# Altium PCB PCB1.PcbDoc (part 4 of 4)
Units mm, origin at the board's own origin, x right, y up, seen from the top; angles counter-clockwise.
Board outline 99.06 x 89.76 mm, 2 copper layers (Top Layer, Bottom Layer); 159 components, 99 nets, 478 pads, 226 vias.
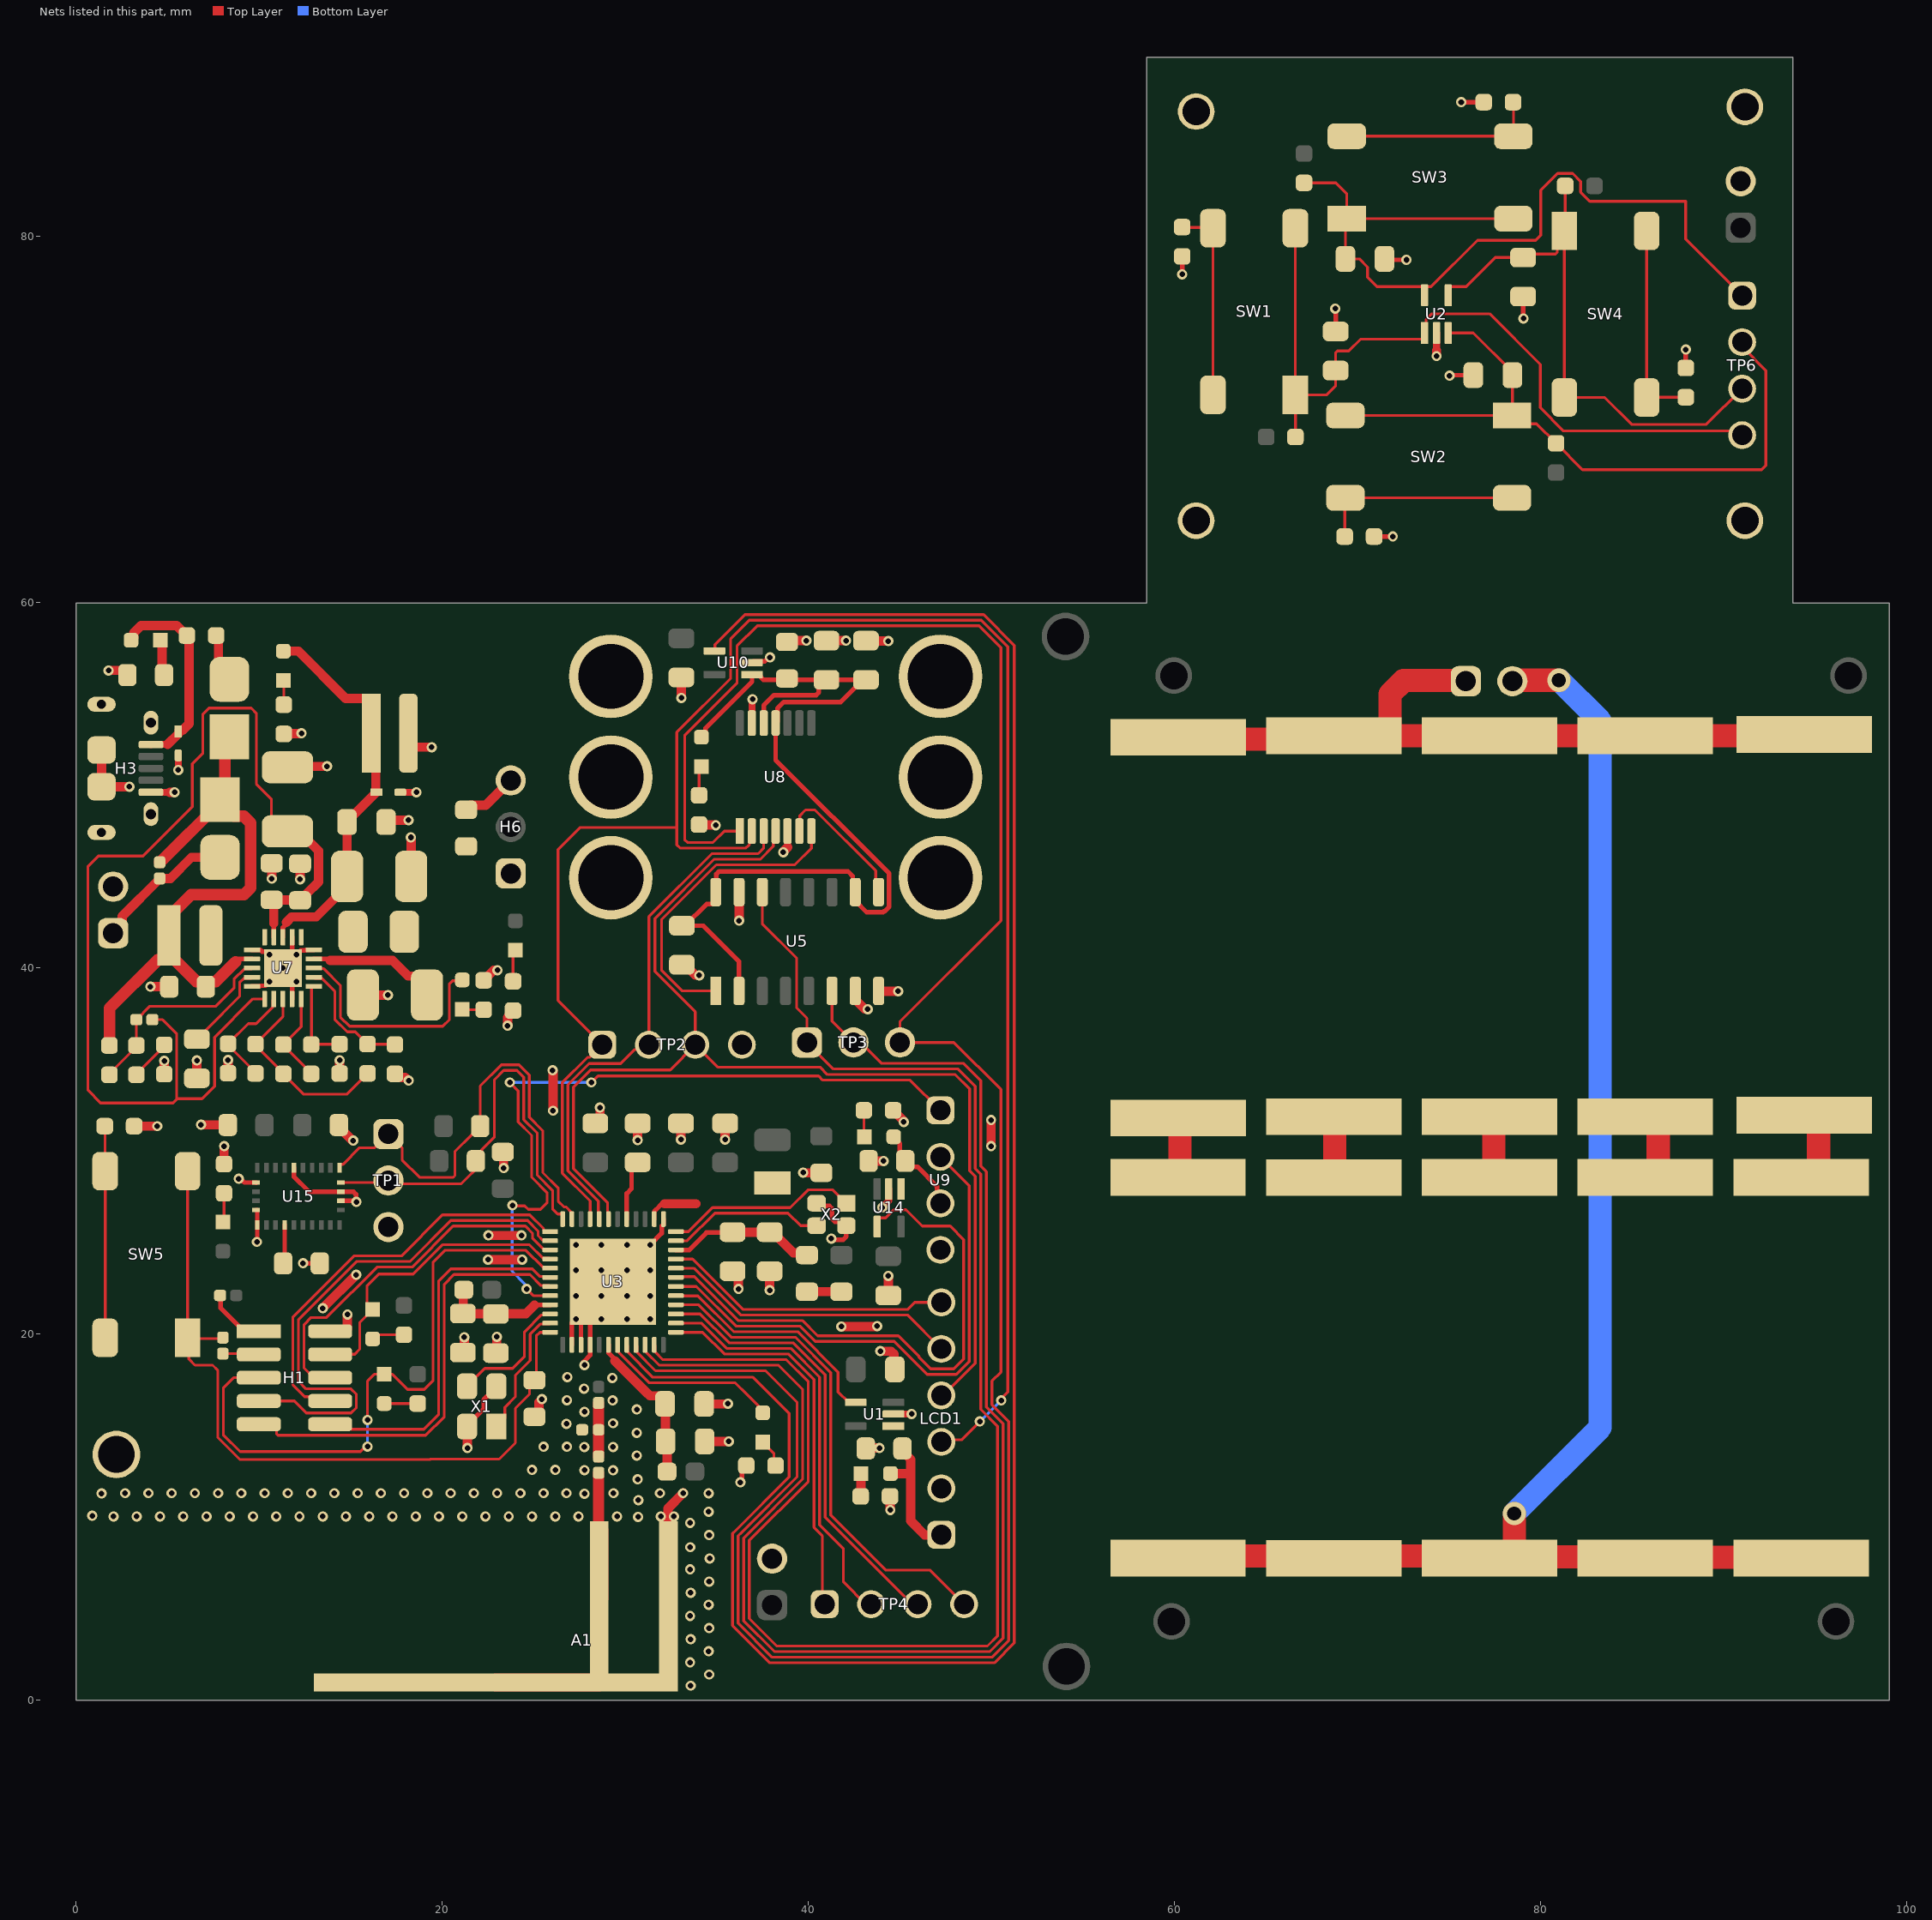
[diagram p2: the nets of this part, all layers, seen from the top]

## Via types
v1: diameter 0.559, hole 0.305, Top Layer to Bottom Layer, tented both sides, 222 vias
v2: diameter 0.61, hole 0.305, Top Layer to Bottom Layer, tented both sides, 2 vias
v3: diameter 1.27, hole 0.762, Top Layer to Bottom Layer, tented both sides, 2 vias

## Nets (pads, with @x,y where several pads share a name; then routed paths per layer and width w, separated by ;. In a path a pad name is that pad's centre, name@x,y a point inside that pad or via, vN(x,y) a via of type N, cw(c..) or ccw(c..) an arc to the next point about the centre after c; other vN are vias at no path point) (continued)
+3V7_VBAT: C24.1 C25.1 H2.V+ LED5.A U4.1 U7.18 | length 21.2
  Top Layer w0.254: U7.18@11.303,41.695 11.306,41.698 11.306,42.225 11.489,42.408
  Top Layer w0.508: LED5.A@11.328,57.315 12.154,57.315 14.732,54.737 15.875,54.737 16.129,54.483 H2.V+@16.129,52.832 16.382,52.579 16.382,49.643 U4.1@16.419,49.606 ; 11.489,42.512 11.775,42.798 13.125,42.798 C24.1@14.811,44.484 ; C24.1@14.811,45.009 14.81,45.01 14.81,47.979 C25.1@14.808,47.981 14.808,48.14 15.087,48.419 15.223,48.419 16.348,49.543 U4.1@16.348,49.552
+5V_VBUS: H3.1 LED6.A R26.1 U6.1 | length 11.1
  Top Layer w0.381: H3.1@4.097,52.211 4.106,52.221 5.01,52.221 ; U6.1@5.588,52.798 U6.1@5.588,52.923
  Top Layer w0.508: LED6.A@3.01,58.058 3.156,58.058 3.156,58.312 3.562,58.718 5.506,58.718 R26.1@6.058,58.166 ; 5.01,52.221 U6.1@5.588,52.798 ; U6.1@5.642,52.994 5.833,52.994 6.185,53.346 R26.1@6.185,58.166
AVDD: C18.1 C19.1 R20.2 U3.34 | length 7.9
  Top Layer w0.152: C18.1@37.49,25.476 C18.1@37.657,25.476 ; C18.1@37.897,25.578 C18.1@38.063,25.578 ; R20.2@39.804,24.452 R20.2@39.929,24.327
  Top Layer w0.254: U3.34@32.772,24.61 33.5,24.61 34.442,25.552 35.382,25.552 C19.1@35.458,25.476
  Top Layer w0.508: C19.1@35.865,25.578 37.49,25.578 C18.1@37.897,25.578 ; C18.1@38.063,25.578 39.189,24.452 R20.2@39.804,24.452
BRD_Reset: C20.1 R12.1 SW5.1 SW5.2 U3.12 | length 42.6
  Top Layer w0.152: SW5.2@6.096,28.912 SW5.1@6.096,19.812 SW5.1@6.139,19.769 ; R12.1@8.026,19.769 SW5.1@6.139,19.769 ; C20.1@25.161,17.265 25.161,17.271 25.572,17.681 C20.1@25.578,17.681 ; U3.12@25.902,20.11 25.342,20.11 25.146,19.914 25.146,17.596 C20.1@25.044,17.494 24.771,17.22 24.771,16.719 24.003,15.951 24.003,14.072 23.114,13.183 19.351,13.183 19.326,13.158 8.966,13.158 7.747,14.377 7.747,18.034 7.468,18.313 6.502,18.313 6.172,18.644 6.172,19.736 SW5.1@6.139,19.769
DECOUPLE: C16.1 U3.41 | length 3.2
  Top Layer w0.254: U3.41@30.087,26.295 30.084,26.298 30.084,27.689 30.349,27.954 C16.1@30.349,29.388
FEED: A1.FEED L2.2 | length 17.1
  Top Layer w0.62: A1.FEED@28.55,9.296 L2.2@28.55,12.438
  Top Layer w0.991: A1.FEED@22.936,0.978 28.562,0.978 28.575,0.991 A1.FEED@28.575,5.588
  Top Layer w1.016: A1.FEED@28.575,5.588 A1.FEED@28.575,9.271
GND: A1.GND C1.2 C2.2 C3.2 C4.2 C5.2 C6.2 C7.2 C8.2 C9.2 C10.2 C11.2 C12.2 C13.2 C14.2 C15.2 C16.2 C17.2 C18.2 C19.2 C20.2 C21.2 C22.2 C23.2 C24.2 C25.2 C26.2 C27.2 C28.2 C29.2 C30.2 C31.2 C33.2 C34.2 C35.2 C36.2 C38.2 C39.2 C42.2 H1.2 H2.V- H3.5 H3.S1 H3.S2 H3.S3 H3.S4 H3.S5 H3.S6 H7.2 LCD1.2 MH1.1 MH2.1 MH3.1 MH4.1 MH7.1 MH8.1 MH9.1 MH10.1 MH11.1 MH16.1 MH17.1 R2.2 R4.1 R7.1 R8.1 R10.1 R17.2 R18.1 R19.2 R21.1 R23.2 R30.2 R31.2 R33.2 R34.1 R36.2 R37.1 R39.2 R40.1 TP1.3 TP2.4 TP5.2 TP7.2 U1.2 U2.2 U3.0 U3.14 U3.15 U3.16 U3.37 U4.2 U5.7 U5.8 U5.15 U6.2 U7.0 U7.1 U7.5 U7.9 U7.15 U7.17 U8.5 U8.13 U9.4 U10.2 U14.2 U15.2 U15.5 U15.6 U15.17 U15.18 U15.25 X1.2 X1.4 X2.2 X2.4 | length 131.6
  Top Layer w0.152: R33.2@8.089,29.303 R33.2@8.089,29.303 ; v1@8.09,30.275 v1(8.091,30.276) ; C23.2@10.668,45.704 C23.2@10.693,45.729 ; C21.2@11.557,50.975 C21.2@11.938,51.356 ; U7.0@11.803,39.056 12.015,39.268 v1(12.04,39.268) ; C36.2@13.315,23.88 C36.2@13.319,23.876 ; H2.V-@18.161,52.832 18.161,52.488 H2.V-@18.579,52.07 ; v1(18.288,47.142) v1@18.311,47.12 ; C30.2@33.096,40.183 C30.2@33.122,40.157 ; U8.13@36.918,53.387 U8.13@36.938,53.407 ; v1@36.938,54.667 v1(36.957,54.686) ; v1(39.726,28.829) v1@39.735,28.82 ; C42.2@43.155,57.887 C42.2@43.18,57.861 ; v1(68.783,76.022) v1@68.809,75.997 ; v1(75.032,72.365) v1@75.057,72.39 ; v1@79.045,75.514 v1(79.07,75.489)
  Top Layer w0.254: v1(8.89,28.499) 9,28.499 9.208,28.291 9.837,28.291 U15.2@9.841,28.288 ; U7.5@9.613,39.005 9.616,39.008 10.045,39.008 10.076,39.039 10.337,39.039 v1(10.566,39.268) ; U7.1@9.613,41.005 9.616,41.002 10.065,41.002 10.153,40.914 10.155,40.914 10.166,40.903 10.405,40.903 v1(10.566,40.742) ; U15.5@9.841,26.788 9.901,26.788 9.903,26.786 9.903,25.067 v1(9.881,25.044) ; C23.2@10.668,45.704 C23.2@10.693,45.679 ; R30.2@11.354,52.794 R30.2@11.373,52.813 ; U7.9@11.803,38.315 U7.0@11.803,39.056 ; U7.17@11.803,41.695 11.803,40.903 11.971,40.735 U7.0@12.033,40.735 ; U15.25@11.903,29.1 11.905,29.098 11.905,28.608 12.725,27.788 15.151,27.788 15.3,27.639 15.3,27.245 v1(15.316,27.229) 15.257,27.288 U15.17@14.466,27.288 ; U7.0@12.064,40.742 12.064,40.766 12.269,40.971 12.53,40.971 12.561,41.002 12.99,41.002 U7.15@12.993,41.005 ; v1@12.3,52.813 v1(12.319,52.832) ; v1(12.407,23.88) C36.2@13.315,23.88 ; R40.1@14.359,34.246 R40.1@14.402,34.246 ; C25.2@16.822,47.981 C25.2@16.924,48.082 ; X1.4@21.361,14.961 21.361,15.031 21.865,15.534 21.876,15.534 22.272,15.93 22.272,16.439 22.421,16.588 22.458,16.588 23.101,17.23 X1.2@23.101,17.413 ; v1@21.374,13.805 v1(21.387,13.792) ; X1.4@21.374,14.858 X1.4@21.43,14.914 ; R18.1@22.263,39.345 R18.1@22.276,39.332 ; C20.2@25.254,15.704 C20.2@25.451,15.9 ; U3.14@27.087,19.425 27.087,20.61 v1(27.305,20.828) ; U3.15@27.587,19.425 27.587,21.11 U3.0@28.087,21.61 ; v1@27.714,18.481 28.084,18.851 28.084,19.422 U3.16@28.087,19.425 U3.0@28.087,21.61 ; C17.2@28.372,31.521 C17.2@28.626,31.775 ; U3.0@29.337,22.86 U3.0@28.087,21.61 ; v1(31.369,24.892) 31.996,25.519 31.996,25.904 32.087,25.995 U3.37@32.087,26.295 ; R31.2@34.036,47.841 R31.2@34.055,47.822 ; v1@34.931,47.822 v1(34.95,47.803) ; v1@35.602,16.197 v1(35.611,16.205) ; v1(36.297,11.913) 36.297,11.989 36.373,12.065 36.373,12.586 R17.2@36.614,12.827 ; U10.2@36.932,56.693 37.005,56.766 37.624,56.766 37.829,56.971 v1(37.912,56.971) ; X2.2@40.455,27.157 40.607,27.005 41.152,27.005 41.3,26.856 41.3,26.299 41.449,26.15 41.861,26.15 X2.4@42.08,25.932 ; v1(41.254,25.227) 41.309,25.171 41.91,25.171 42.08,25.341 X2.4@42.08,25.962 ; U5.8@43.84,38.753 U5.8@43.858,38.735 ; C38.2@44.374,22.123 C38.2@44.4,22.15 ; R36.2@44.64,32.18 R36.2@44.64,32.233 ; C2.2@44.677,18.137 C2.2@44.729,18.085 ; v1(60.427,77.902) R4.1@60.427,78.88 ; C3.2@68.809,74.778 v1@68.809,75.997 ; R7.1@70.904,63.576 v1(71.933,63.576) ; C5.2@71.476,78.74 71.526,78.689 v1(72.669,78.689) ; v1@75.057,72.39 C4.2@76.327,72.39 ; v1(75.667,87.3) R8.1@76.899,87.3 ; v1@79.045,75.514 C6.2@79.045,76.683 ; R10.1@87.935,72.784 v1(87.935,73.787)
  Top Layer w0.381: H3.5@4.102,49.606 v1@5.131,49.606 ; v1(5.588,50.825) U6.2@5.588,51.623 ; U4.2@17.719,49.606 v1(18.593,49.606) ; U8.13@36.938,53.407 v1@36.938,54.667 ; 38.868,46.607 U8.5@38.868,47.487 ; v1(44.044,26.924) 44.044,26.949 44.39,27.296 44.39,27.931 U14.2@44.399,27.94 ; U1.2@44.653,15.646 v1(45.644,15.646) ; 74.32,73.736 U2.2@74.32,74.691
  Top Layer w0.508: H3.S4@1.397,51.911 H3.S5@1.397,49.911 v1(2.921,49.911) ; v1(1.778,56.261) R39.2@2.81,56.261 ; R21.1@3.175,31.369 v1(4.445,31.369) ; v1(4.064,38.989) C26.2@5.096,38.989 ; R23.2@4.826,34.214 v1(4.826,34.932) ; v1@5.131,49.606 v1(5.385,49.606) ; C27.2@6.604,33.985 v1(6.604,34.963) ; v1(6.833,31.445) 6.841,31.437 8.29,31.437 C39.2@8.298,31.429 ; R33.2@8.089,29.303 v1@8.09,30.275 ; R34.1@8.306,34.265 v1(8.306,34.983) ; v1(10.693,44.882) C23.2@10.693,45.679 ; R30.2@11.373,52.813 v1@12.3,52.813 ; C21.2@11.938,51.356 12.275,51.019 13.706,51.019 v1(13.716,51.029) ; v1(12.243,44.856) C22.2@12.243,45.704 ; v1(13.478,21.422) v1(15.307,23.25) ; H1.2@13.888,20.168 14.698,20.168 14.824,20.294 14.824,21.072 v1(14.834,21.082) ; R40.1@14.359,34.246 14.402,34.289 v1(14.402,34.965) ; C35.2@14.54,31.318 14.54,31.151 15.102,30.589 15.13,30.589 v1(15.14,30.579) ; C28.2@15.674,38.532 v1(17.043,38.532) ; C25.2@16.924,48.082 v1(18.161,48.082) ; R37.1@17.424,34.227 17.62,34.031 17.985,34.031 18.161,33.855 v1(18.174,33.855) ; C24.2@18.311,45.009 v1@18.311,47.12 ; H2.V-@18.579,52.07 v1(19.431,52.07) ; C8.2@21.133,18.999 21.209,19.075 v1(21.209,19.837) ; v1@21.374,13.805 X1.4@21.374,14.858 ; R18.1@22.263,39.345 22.288,39.345 22.819,39.875 23.016,39.875 v1(23.026,39.885) ; v1(22.504,24.079) v1(24.369,24.079) ; v1(22.53,25.4) v1(24.333,25.4) ; C9.2@22.936,18.974 22.987,19.025 v1(22.987,19.863) ; C15.2@23.317,29.956 23.358,29.915 23.358,29.093 v1(23.368,29.083) ; v1(23.571,36.855) 23.581,36.865 23.581,37.305 23.68,37.404 23.68,37.485 R19.2@23.876,37.681 ; C20.2@25.044,15.494 25.254,15.704 25.291,15.74 25.291,16.285 25.451,16.445 v1(25.451,16.459) ; v1(26.035,34.417) 26.035,34.403 26.06,34.378 v1(26.06,32.212) ; C17.2@28.626,31.775 v1(28.626,32.387) ; v1(30.683,30.607) C16.2@30.683,31.521 ; A1.GND@32.334,5.779 32.334,10.49 v1@33.172,11.328 ; v1(33.045,30.632) C14.2@33.045,31.521 ; v1(33.071,54.762) C33.2@33.071,55.88 ; C30.2@33.122,40.157 33.295,40.157 33.839,39.614 34.036,39.614 v1(34.046,39.604) ; R31.2@34.055,47.822 v1@34.931,47.822 ; C11.2@34.311,16.197 v1@35.602,16.197 ; C10.2@34.616,14.148 v1(35.662,14.148) ; v1(35.458,30.632) C13.2@35.458,31.521 ; C19.2@35.865,23.444 35.906,23.444 36.184,23.166 36.184,22.489 v1(36.194,22.479) ; v1(36.22,42.596) U5.15@36.22,44.153 ; v1(37.897,22.403) C18.2@37.897,23.444 ; v1(38.633,46.33) 38.633,46.372 38.868,46.607 ; C31.2@38.837,57.887 v1(39.903,57.887) ; v1@39.735,28.82 C12.2@40.716,28.82 ; C29.2@40.996,57.887 v1(42.062,57.887) ; v1(41.808,20.422) 43.725,20.422 43.75,20.447 v1(43.764,20.447) ; U5.7@42.57,38.753 42.57,38.278 43.086,37.763 43.236,37.763 v1(43.245,37.753) ; C1.2@43.069,13.792 v1(43.891,13.792) ; C42.2@43.18,57.861 v1(44.374,57.861) ; C34.2@43.298,29.464 v1(44.12,29.464) ; U5.8@43.858,38.735 v1(44.907,38.735) ; v1(43.942,19.075) 44.526,19.075 44.677,18.924 C2.2@44.677,18.137 ; v1(44.374,23.19) 44.374,22.176 C38.2@44.4,22.15 ; R2.2@44.463,11.151 44.473,11.14 44.473,10.41 v1(44.482,10.401) ; R36.2@44.64,32.18 44.693,32.18 45.202,31.671 45.202,31.607 v1(45.212,31.598) ; v1(49.987,30.277) v1(49.987,31.699) ; v1(74.32,73.431) 74.32,73.736
  other v1: 33.572,0.805 34.588,1.414 33.547,2.075 34.563,2.684 33.572,3.345 34.588,3.954 33.547,4.615 34.563,5.224 33.572,5.885 34.588,6.494 33.547,7.155 34.615,7.76 33.549,8.37 34.588,9.034 33.547,9.695 30.703,10.029 2.051,10.05 3.321,10.05 4.591,10.05 5.861,10.05 7.131,10.05 8.401,10.05 9.671,10.05 10.941,10.05 12.211,10.05 13.481,10.05 14.751,10.05 16.021,10.05 17.291,10.05 18.561,10.05 19.831,10.05 21.101,10.05 22.371,10.05 23.641,10.05 24.911,10.05 26.181,10.05 27.451,10.05 29.559,10.05 31.946,10.05 32.658,10.05 0.891,10.087 34.563,10.304 30.721,10.943 1.397,11.303 27.781,11.295 2.686,11.32 3.956,11.32 5.226,11.32 6.496,11.32 7.766,11.32 9.036,11.32 10.306,11.32 11.576,11.32 12.846,11.32 14.116,11.32 15.386,11.32 16.656,11.32 17.926,11.32 19.196,11.32 20.466,11.32 21.736,11.32 23.006,11.32 24.276,11.32 25.546,11.32 26.79,11.32 29.356,11.32 31.896,11.32 33.166,11.32 34.557,11.318 30.679,12.08 27.775,12.584 29.337,12.573 24.911,12.59 26.181,12.59 30.637,13.373 27.771,13.846 29.337,13.843 25.546,13.86 26.816,13.86 30.631,14.614 26.797,15.113 29.337,15.138 27.781,15.765 30.635,15.892 29.309,16.388 26.816,16.4 27.753,17.031 29.305,17.62 26.839,17.666 27.774,18.322 28.702,20.828 30.099,20.828 31.369,20.828 27.305,22.098 28.702,22.098 30.099,22.098 31.369,22.098 28.702,23.495 30.099,23.495 31.369,23.495 28.702,24.892 30.099,24.892 11.303,40.005 12.04,40.742
  other v2: 27.305,23.495 27.305,24.892
HFXTAL_N: U3.10 X1.3 | length 7
  Top Layer w0.152: X1.3@21.361,17.161 21.361,17.203 21.873,17.714 21.915,17.714 22.336,18.136 23.851,18.136 24.5,18.785 24.5,20.13 25.426,21.056 25.848,21.056 U3.10@25.902,21.11
HFXTAL_P: U3.11 X1.1 | length 7.1
  Top Layer w0.152: X1.1@22.976,14.961 23.431,15.415 23.431,16.014 24.003,16.586 24.003,17.768 24.805,18.57 24.805,20.003 25.358,20.556 25.848,20.556 U3.11@25.902,20.61
I2C0_SCL: R13.2 TP1.2 U3.48 U15.19 | length 23.9
  Top Layer w0.152: U15.19@14.466,28.288 16.959,28.288 TP1.2@17.069,28.397 17.247,28.219 21.044,28.219 22.161,29.336 22.161,30.076 22.86,30.776 22.86,33.909 23.368,34.417 24.079,34.417 24.46,34.036 24.46,31.729 25.197,30.992 25.197,28.703 26.035,27.865 26.035,26.847 26.318,26.564 26.533,26.564 26.587,26.511 U3.48@26.587,26.295
I2C0_SDA: R1.2 TP1.1 U3.47 U15.20 | length 26.5
  Top Layer w0.152: U15.20@14.403,29.1 14.403,29.238 14.452,29.286 14.589,29.286 15.491,30.188 16.32,30.188 TP1.1@16.647,30.515 ; TP1.1@17.069,30.937 TP1.1@16.647,30.515 ; U3.47@27.087,26.295 27.033,26.349 27.033,26.694 26.774,26.954 26.666,26.954 26.34,27.28 26.34,27.991 25.502,28.829 25.502,31.118 24.765,31.855 24.765,34.162 24.205,34.722 23.242,34.722 22.082,33.562 22.082,31.363 21.602,30.883 21.596,30.883 20.701,29.988 20.701,28.664 20.612,28.575 18.771,28.575 17.818,29.528 17.818,30.188 17.491,30.515 TP1.1@16.647,30.515
IMU_CAP: C36.1 U15.9 | length 2.1
  Top Layer w0.254: C36.1@11.303,23.876 11.403,23.976 U15.9@11.403,25.975
LBOOST: L7.2 U7.20
LBUCK: L8.1 U7.16
LCD_CS: LCD1.5 U3.32 | length 16.3
  Top Layer w0.152: U3.32@32.772,23.61 33.747,23.61 36.301,21.057 45.415,21.057 LCD1.5@47.269,19.202
LCD_EXTCOM: LCD1.6 U3.33 | length 15.8
  Top Layer w0.152: U3.33@32.772,24.11 33.678,24.11 36.427,21.361 45.441,21.361 45.822,21.742 LCD1.6@47.269,21.742
LCD_PWR: C1.1 LCD1.1 LED1.A U1.1 | length 7.3
  Top Layer w0.508: LED1.A@44.488,12.395 45.568,12.395 45.593,12.37 ; C1.1@45.069,13.792 45.069,13.692 45.593,13.168 45.593,12.37 ; LCD1.1@47.269,9.042 46.355,9.042 45.593,9.804 45.593,12.37
LCD_SW: U1.4 U3.29 | length 12.9
  Top Layer w0.152: U3.29@32.772,22.11 32.791,22.091 33.973,22.091 35.922,20.142 39.422,20.142 41.631,17.934 41.631,16.852 42.201,16.281 U1.4@42.596,16.281
LFXTAL_N: U3.35 X2.3 | length 8.6
  Top Layer w0.152: U3.35@32.772,25.11 33.39,25.11 34.9,26.619 38.894,26.619 39.582,25.932 X2.3@40.455,25.932
LFXTAL_P: U3.36 X2.1 | length 10.6
  Top Layer w0.152: U3.36@32.772,25.61 33.459,25.61 34.773,26.924 39.014,26.924 39.98,27.889 41.347,27.889 X2.1@42.08,27.157
MAG_ENC1_PWR: C29.1 C30.1 C31.1 C42.1 LED9.A U5.2 U5.10 U5.16 U8.11 U8.12 U10.1 | length 55.3
  Top Layer w0.254: C30.1@33.096,42.316 C30.1@33.263,42.316 ; LED9.A@34.163,52.616 34.38,52.833 34.38,53.1 36.932,55.651 36.932,55.909 U10.1@36.932,56.032 37.327,56.032 37.4,55.959 37.4,55.902 37.548,55.753 38.837,55.753 C29.1@40.996,55.753 ; U5.2@36.22,38.753 36.22,40.361 34.265,42.316 C30.1@33.263,42.316 ; U8.12@37.568,53.387 37.568,54.357 38.125,54.915 40.428,54.915 40.577,55.064 40.577,55.357 40.973,55.753 C29.1@40.996,55.753 ; C42.1@43.155,55.753 C42.1@42.988,55.753 ; C30.1@33.263,42.316 34.446,43.5 34.732,43.5 34.95,43.718 U5.16@34.95,44.153 34.982,44.184 34.982,45.139 35.131,45.288 42.164,45.288 42.432,45.02 42.432,44.291 U5.10@42.57,44.153 42.57,43.678 43.195,43.053 44.081,43.053 44.127,43.098 44.168,43.098 44.42,43.35 44.42,45.166 38.218,51.368 U8.11@38.218,53.387 38.316,53.485 38.316,54.185 38.665,54.534 41.769,54.534 C42.1@42.988,55.753 ; C29.1@40.996,55.753 C42.1@42.988,55.753
MAG_ENC_A: U5.1 U8.7 | length 16.9
  Top Layer w0.152: U5.1@34.95,38.753 33.126,38.753 31.986,39.892 31.986,42.647 34.983,45.644 39.268,45.644 40.168,46.544 U8.7@40.168,47.487
MAG_ENC_B: U5.9 U8.6 | length 7.7
  Top Layer w0.152: U8.6@39.518,47.487 39.538,47.507 39.538,48.326 39.853,48.641 40.361,48.641 43.681,45.321 43.681,44.312 U5.9@43.84,44.153
MAG_ENC_CS: TP3.3 U3.21 U8.1 | length 131.2
  Top Layer w0.152: U3.21@30.587,19.425 30.641,19.371 30.641,19.026 31.658,18.009 37.668,18.009 39.39,16.287 39.39,12.213 36.347,9.17 36.17,8.992 36.17,4.467 36.17,4.218 38.025,2.362 38.275,2.362 50.04,2.362 50.952,3.274 50.952,15.238 50.038,16.152 50.038,17.45 50.521,17.932 50.521,33.376 47.955,35.941 TP3.3@45.009,35.941 45.009,37.084 50.521,42.596 50.521,57.506 49.327,58.699 37.214,58.699 36.108,57.593 36.108,55.567 33.249,52.708 33.249,47.015 33.401,46.863 34.798,46.863 35.422,47.487 U8.1@36.268,47.487
MAG_ENC_FD_A: TP3.2 U3.22 U5.6 | length 81.1
  Top Layer w0.152: U3.22@31.087,19.425 31.141,19.371 31.141,19.026 31.853,18.313 38.379,18.313 39.695,16.998 39.695,12.086 36.652,9.044 36.474,8.866 36.474,4.594 36.474,4.344 38.152,2.667 38.401,2.667 49.914,2.667 50.648,3.4 50.648,15.111 49.733,16.026 49.733,28.878 49.428,29.183 49.428,33.858 48.489,34.798 44.017,34.798 42.874,35.941 TP3.2@42.469,35.941 41.3,37.109 U5.6@41.3,38.753
MAG_ENC_FD_B: TP3.1 U3.23 U5.14 | length 88.1
  Top Layer w0.152: U3.23@31.587,19.425 31.641,19.371 31.641,19.026 32.049,18.618 38.791,18.618 40,17.41 40,11.96 36.779,8.74 36.779,4.47 38.278,2.972 49.788,2.972 50.343,3.527 50.343,14.985 49.428,15.9 49.428,28.752 49.124,29.057 49.124,33.553 48.184,34.493 41.377,34.493 TP3.1@39.929,35.941 39.929,37.262 39.37,37.821 39.37,40.538 37.49,42.418 U5.14@37.49,44.153
MAG_ENC_SW: U3.20 U10.4 | length 112.7
  Top Layer w0.152: U3.20@30.087,19.425 30.141,19.371 30.141,19.026 31.514,17.653 36.982,17.653 38.958,15.678 38.958,12.212 36.043,9.296 35.865,9.119 35.865,4.341 35.865,4.092 37.899,2.057 38.149,2.057 50.167,2.057 51.257,3.148 51.257,57.633 49.581,59.309 36.546,59.309 34.904,57.667 34.904,57.357 U10.4@34.874,57.328
NetC7_1: C7.1 L1.2 L2.1 | length 2.9
  Top Layer w0.62: L2.1@28.55,13.318 C7.1@28.55,14.783
  Top Layer w0.622: C7.1@28.55,14.8 L1.2@28.55,16.248
NetD1_A: D1.A R26.2 | length 2.7
  Top Layer w0.508: R26.2@7.658,58.166 7.785,58.039 7.785,56.376 D1.A@8.382,55.779
NetH1_1: H1.1 R11.2 | length 3.3
  Top Layer w0.254: R11.2@7.874,22.123 7.903,22.094 7.903,21.432 9.168,20.168 H1.1@9.988,20.168
NetH1_3: H1.3 R12.2 | length 2
  Top Layer w0.152: R12.2@8.026,18.94 9.945,18.94 H1.3@9.988,18.898
NetH6_3: H6.3 R16.1 | length 3.1
  Top Layer w0.508: R16.1@21.311,48.65 21.557,48.896 22.392,48.896 H6.3@23.749,50.254
NetH8_1: H8.1 S1.V+ S3.V+ S5.V+ S7.V+ S9.V+ | length 40.9
  Top Layer w1.27: S1.V+@59.967,52.373 S1.V+@60.206,52.612 ; S1.V+@60.411,52.501 71.217,52.501 S3.V+@71.407,52.691 ; H8.1@76.111,55.706 72.516,55.706 71.772,54.962 71.772,53.056 S3.V+@71.407,52.691 ; S9.V+@93.853,52.691 S7.V+@85.725,52.691 S5.V+@77.216,52.691 S3.V+@71.407,52.691
NetH8_2: H8.2 S2.V- S4.V- S6.V- S8.V- S10.V- | length 89
  Top Layer w1.27: S2.V-@59.774,7.888 S6.V-@77.216,7.888 ; S6.V-@77.216,7.775 78.197,7.775 S6.V-@78.26,7.838 ; H8.2@78.461,55.677 78.511,55.728 v3(81.001,55.728) ; v3(78.562,10.211) 78.562,8.14 S6.V-@78.26,7.838 ; S10.V-@95.189,7.787 95.151,7.825 86.464,7.825 86.426,7.863 86.4,7.838 S6.V-@78.26,7.838
  Bottom Layer w1.27: v3(78.562,10.211) 83.261,14.91 83.261,53.498 81.032,55.728 v3(81.001,55.728)
NetL6_2: L6.2 R20.1 | length 1.9
  Top Layer w0.508: R20.1@39.929,22.327 L6.2@41.808,22.327
NetLED1_C: LED1.C R2.1 | length 1.3
  Top Layer w0.508: R2.1@42.863,11.151 42.875,11.163 42.875,12.383 LED1.C@42.888,12.395
NetLED2_A: LED2.A R14.2 | length 1.8
  Top Layer w0.152: LED2.A@16.205,19.749 16.434,19.977 R14.2@17.913,19.977
NetLED3_A: LED3.A R15.2 | length 1.8
  Top Layer w0.152: LED3.A@16.84,16.218 R15.2@18.669,16.218
NetLED4_C: LED4.C R17.1 | length 1.6
  Top Layer w0.152: LED4.C@37.516,14.11 38.12,13.506 38.12,12.921 R17.1@38.214,12.827
NetLED5_C: LED5.C R30.1 | length 1.3
  Top Layer w0.152: LED5.C@11.328,55.715 11.354,55.69 R30.1@11.354,54.394
NetLED6_C: LED6.C R39.1 | length 2
  Top Layer w0.508: LED6.C@4.61,57.912 4.71,57.812 4.71,56.107 R39.1@4.81,56.007
NetLED7_C: LED7.C R18.2 | length 1.2
  Top Layer w0.152: LED7.C@21.107,37.757 21.133,37.732 R18.2@22.276,37.732
NetLED8_C: LED8.C R19.1 | length 1.8
  Top Layer w0.152: R19.1@23.876,39.281 23.876,40.856 LED8.C@24.003,40.983
NetLED9_C: LED9.C R31.1 | length 1.6
  Top Layer w0.152: R31.1@34.036,49.441 34.036,50.889 LED9.C@34.163,51.016
NetLED11_C: LED11.C R33.1 | length 1.6
  Top Layer w0.152: LED11.C@8.028,26.133 8.089,26.195 R33.1@8.089,27.703
NetLED12_C: LED12.C R36.1 | length 1.5
  Top Layer w0.152: LED12.C@42.977,30.785 43.04,30.848 R36.1@43.04,32.233
NetR4_2: R4.2 SW1.3 SW1.4 | length 11.2
  Top Layer w0.152: R4.2@60.071,80.454 62.068,80.454 SW1.4@62.107,80.416 SW1.3@62.107,71.316
NetR7_2: R7.2 SW2.3 SW2.4 | length 11.2
  Top Layer w0.152: R7.2@69.304,63.576 69.304,65.65 SW2.4@69.342,65.688 SW2.3@78.442,65.688
NetR8_2: R8.2 SW3.3 SW3.4 | length 11.1
  Top Layer w0.152: SW3.3@69.411,85.442 SW3.4@78.511,85.442 78.524,85.455 R8.2@78.524,87.401
NetR10_2: R10.2 SW4.3 SW4.4 | length 11.2
  Top Layer w0.152: SW4.3@85.797,80.271 SW4.4@85.797,71.171 85.81,71.184 R10.2@87.935,71.184
NetR21_2: R21.2 SW5.3 SW5.4 | length 11.6
  Top Layer w0.152: SW5.4@1.585,28.923 R21.2@1.585,31.358 ; SW5.3@1.596,19.812 SW5.4@1.596,28.912
  Top Layer w0.508: R21.2@1.575,31.369 R21.2@1.585,31.358 ; SW5.4@1.585,28.923 SW5.4@1.596,28.912
NetR22_2: R22.2 R23.1 | length 2.3
  Top Layer w0.152: R22.2@3.302,34.176 3.302,34.233 4.826,35.757 R23.1@4.826,35.814
NetS1_V-: S1.V- S2.V+ | length 2.9
  Top Layer w1.27: S2.V+@60.308,28.688 S1.V-@60.308,31.547
NetS3_V-: S3.V- S4.V+ | length 3.4
  Top Layer w1.27: S4.V+@68.741,28.612 68.766,28.637 S3.V-@68.766,31.99
NetS5_V-: S5.V- S6.V+ | length 3.4
  Top Layer w1.27: S6.V+@77.453,28.612 S5.V-@77.453,31.965
NetS7_V-: S7.V- S8.V+ | length 3.4
  Top Layer w1.27: S7.V-@86.36,32.018 S7.V-@86.411,31.967 ; S8.V+@86.426,28.663 S7.V-@86.426,31.965
NetS9_V-: S9.V- S10.V+ | length 3.4
  Top Layer w1.27: S10.V+@95.189,28.587 S9.V-@95.189,31.94 ; S9.V-@95.544,31.965 S9.V-@95.57,31.94
OK_HYST: R28.1 R35.2 U7.10 | length 5.1
  Top Layer w0.152: U7.10@12.303,38.315 12.303,36.801 R28.1@11.328,35.827 11.328,35.789 12.852,34.265 R35.2@12.852,34.227
OK_PROG: R35.1 R40.2 U7.11 | length 4.8
  Top Layer w0.152: U7.11@12.993,39.005 12.916,39.005 12.862,38.951 12.862,35.837 14.392,35.837 R40.2@14.402,35.846
PAVDD: C10.1 C11.1 L4.2 U3.18 | length 8.5
  Top Layer w0.254: U3.18@29.087,19.425 29.09,19.422 29.09,18.982 29.439,18.633
  Top Layer w0.508: 29.439,18.545 31.195,16.789 31.35,16.635 31.899,16.635 32.178,16.356 C11.1@32.178,16.197 32.192,16.182 32.192,14.163 C10.1@32.207,14.148 32.297,14.058 32.297,12.587 L4.2@32.387,12.497
PTI_DATA: H1.10 U3.6 | length 20.2
  Top Layer w0.152: H1.10@13.888,15.088 14.77,15.088 15.049,14.808 18.999,14.808 19.812,15.621 19.812,22.911 20.472,23.571 22.41,23.571 22.414,23.567 23.415,23.567 23.419,23.571 24.924,23.571 25.331,23.164 25.848,23.164 U3.6@25.902,23.11
PTI_FRAME: H1.9 U3.7 | length 24.5
  Top Layer w0.152: H1.9@9.988,15.088 10.661,15.088 10.956,14.792 10.956,14.568 11.045,14.479 19.101,14.479 20.117,15.495 20.117,22.733 20.65,23.266 22.284,23.266 22.288,23.262 23.541,23.262 23.545,23.266 24.798,23.266 25.4,22.664 25.848,22.664 U3.7@25.902,22.61
RFVDD: C8.1 C9.1 L3.2 U3.9 | length 6.3
  Top Layer w0.254: 25.044,21.59 25.064,21.61 U3.9@25.902,21.61
  Top Layer w0.508: L3.2@21.186,22.428 21.159,22.402 21.159,21.159 C8.1@21.133,21.133 21.145,21.12 22.924,21.12 C9.1@22.936,21.107 ; C9.1@22.935,21.109 22.948,21.122 24.576,21.122 25.044,21.59
SOLAR_IN: D2.A H7.1 R49.1 | length 7.9
  Top Layer w0.508: H7.1@1.778,41.91 2.527,42.659 2.527,42.834 4.572,44.879 R49.1@4.572,44.899 5.159,44.899 6.31,46.05 D2.A@7.874,46.05
SPI_CLK: LCD1.3 TP2.1 U3.45 U8.2 | length 108.9
  Top Layer w0.152: U3.45@28.087,26.295 28.087,27.282 26.568,28.8 26.568,33.755 27.941,35.128 28.067,35.128 TP2.1@28.753,35.814 26.327,38.24 26.327,46.469 27.542,47.684 32.817,47.684 ; U8.2@36.918,47.487 36.792,47.361 36.792,46.762 36.722,46.692 36.588,46.558 32.994,46.558 32.817,46.736 32.817,47.684 ; LCD1.3@47.269,14.122 47.379,14.232 48.37,14.232 v1(49.374,15.236) ; v1(50.546,16.385) 50.546,16.495 50.902,16.851 50.902,57.556 49.454,59.004 36.779,59.004 35.763,57.988 35.763,55.832 32.817,52.886 32.817,47.684
  Bottom Layer w0.152: v1(49.374,15.236) 50.523,16.385 v1(50.546,16.385)
SPI_MISO: TP2.2 U3.44 U8.3 | length 29.1
  Top Layer w0.152: U3.44@28.587,26.295 28.533,26.349 28.533,27.267 26.873,28.927 26.873,33.629 28.031,34.787 29.757,34.787 30.522,35.552 31.03,35.552 TP2.2@31.293,35.814 31.293,42.815 34.731,46.253 37.262,46.253 37.567,46.558 37.567,47.486 U8.3@37.568,47.487
SPI_MOSI: LCD1.4 TP2.3 U3.43 U8.4 | length 66.1
  Top Layer w0.152: U3.43@29.087,26.295 29.033,26.349 29.033,27.198 27.178,29.053 27.178,33.503 28.118,34.442 32.461,34.442 TP2.3@33.833,35.814 ; U8.4@38.218,47.487 38.092,47.361 38.092,46.652 37.388,45.949 34.857,45.949 31.623,42.715 31.623,39.824 33.833,37.615 TP2.3@33.833,35.814 ; LCD1.4@47.269,16.662 47.37,16.662 49.124,18.416 49.124,28.626 48.819,28.931 48.819,33.401 48.031,34.188 41.046,34.188 40.64,34.595 35.052,34.595 TP2.3@33.833,35.814
SW_BACK: TP4.2 U3.26 | length 22.7
  Top Layer w0.152: U3.26@32.772,20.61 34.161,20.61 35.543,19.228 39.044,19.228 40.615,17.657 40.615,9.581 41.921,8.274 41.921,6.466 43.18,5.207 TP4.2@43.307,5.207
SW_BACK_S: C4.1 R5.2 SW2.1 SW2.2 TP6.2 U2.3 | length 38.3
  Top Layer w0.152: SW2.2@69.342,70.188 SW2.1@78.442,70.188 ; U2.3@74.959,74.695 76.323,74.695 78.461,72.557 C4.1@78.461,72.39 78.461,70.206 SW2.1@78.442,70.188 ; TP6.2@91.008,74.193 91.008,73.939 92.304,72.644 92.304,67.462 92.068,67.226 86.861,67.226 ccw(c86.843,67.075) 86.825,67.226 82.291,67.226 R5.2@80.848,68.669 79.784,69.733 78.897,69.733 SW2.1@78.442,70.188
SW_DOWN: TP4.3 U3.27 | length 24.2
  Top Layer w0.152: U3.27@32.772,21.11 34.092,21.11 35.669,19.533 39.17,19.533 40.919,17.783 40.919,10.004 45.717,5.207 TP4.3@45.847,5.207 ; TP4.3@45.844,5.08 TP4.3@45.847,5.08
SW_DOWN_S: C6.1 R9.2 SW4.1 SW4.2 TP6.3 U2.4 | length 30.5
  Top Layer w0.152: U2.4@74.959,76.752 74.959,77.097 75.083,77.221 75.936,77.221 77.532,78.816 C6.1@79.045,78.816 79.235,79.007 80.82,79.007 80.909,79.096 80.909,79.318 80.983,79.392 SW4.1@81.297,79.392 ; R9.2@81.344,82.728 81.344,80.317 SW4.1@81.297,80.271 SW4.1@81.297,79.392 ; TP6.3@91.008,71.653 89.052,69.698 84.978,69.698 83.504,71.171 SW4.2@81.297,71.171 SW4.1@81.297,79.392
SW_GO: TP4.1 U3.25 | length 21.1
  Top Layer w0.152: U3.25@32.772,20.11 34.23,20.11 35.417,18.923 38.917,18.923 40.31,17.53 40.31,9.454 40.767,8.997 TP4.1@40.767,5.258
SW_GO_S: C5.1 R6.2 SW3.1 SW3.2 TP6.1 U2.5 | length 46.7
  Top Layer w0.152: R6.2@67.081,82.893 68.821,82.893 69.411,82.303 SW3.1@69.411,80.942 ; U2.5@73.664,76.752 U2.5@73.664,77.097 ; SW3.2@78.511,80.942 SW3.1@69.411,80.942 ; TP6.1@91.008,76.733 87.925,79.817 87.925,81.89 82.69,81.89 82.194,82.386 82.194,82.968 81.756,83.406 80.931,83.406 80.01,82.486 80.01,80.035 79.731,79.756 76.556,79.756 74.02,77.221 73.787,77.221 U2.5@73.664,77.097 ; SW3.1@69.411,80.942 69.342,80.873 C5.1@69.342,78.74 70.104,78.74 70.554,78.29 70.554,77.731 71.064,77.221 73.54,77.221 U2.5@73.664,77.097
SW_UP: TP4.4 U3.28 | length 27.1
  Top Layer w0.152: U3.28@32.772,21.61 34.023,21.61 35.796,19.837 39.296,19.837 41.224,17.909 41.224,10.131 44.242,7.113 46.659,7.113 TP4.4@48.514,5.258
SW_UP_S: C3.1 R3.2 SW1.1 SW1.2 TP6.4 U2.1 | length 43.2
  Top Layer w0.152: SW1.2@66.607,80.416 SW1.1@66.607,71.316 ; R3.2@66.611,69.012 66.611,71.311 SW1.1@66.607,71.316 ; U2.1@73.664,74.695 73.748,74.778 73.748,75.424 74.066,75.743 77.216,75.743 79.985,72.974 79.985,70.614 81.256,69.342 90.78,69.342 TP6.4@91.008,69.113 ; U2.1@73.748,74.563 73.54,74.355 70.164,74.355 69.52,73.711 68.898,73.711 68.809,73.622 C3.1@68.809,72.644 68.809,71.806 68.319,71.316 SW1.1@66.607,71.316
SWCLK: H1.8 U3.1 | length 22.9
  Top Layer w0.152: H1.8@13.888,16.358 13.654,16.591 12.492,16.591 11.85,17.233 11.85,20.943 15.189,24.282 17.78,24.282 20.015,26.518 24.796,26.518 25.548,25.766 25.548,25.664 25.602,25.61 U3.1@25.902,25.61
SWDIO: H1.7 U3.2 | length 29.9
  Top Layer w0.152: H1.7@9.988,16.358 11.926,16.358 12.588,15.696 15.019,15.696 15.317,15.994 15.317,16.721 15.019,17.019 12.572,17.019 12.155,17.436 12.155,20.817 15.315,23.978 18.24,23.978 20.475,26.213 24.67,26.213 25.243,25.639 25.243,25.385 25.465,25.164 25.848,25.164 U3.2@25.902,25.11
SWO: H1.6 U3.3 | length 20.4
  Top Layer w0.152: H1.6@13.888,17.628 13.006,17.628 12.979,17.628 12.459,18.148 12.459,20.531 12.842,20.914 13.688,20.914 16.447,23.673 18.366,23.673 20.602,25.908 24.544,25.908 24.939,25.513 24.939,25.259 24.943,25.255 24.943,25.224 25.503,24.664 25.848,24.664 U3.3@25.902,24.61
Test_Pin: LED4.A U3.19 | length 9.8
  Top Layer w0.152: U3.19@29.587,19.425 29.641,19.371 29.641,19.026 31.319,17.348 36.017,17.348 36.659,16.707 37.268,16.097 37.268,15.957 LED4.A@37.516,15.71
ULTSEN_PWR: C34.1 LED12.A U9.3 U14.1 | length 4.9
  Top Layer w0.254: LED12.A@44.666,30.785 44.666,30.745 45.001,30.411 45.001,29.761 45.617,29.145 45.963,29.145 47.033,28.075 47.033,27.339 U9.3@47.219,27.153
ULTSEN_SW: U3.31 U14.4 | length 30.6
  Top Layer w0.152: U3.31@32.772,23.11 32.806,23.144 33.783,23.144 36.174,20.752 39.675,20.752 40.513,19.914 44.92,19.914 46.05,18.783 46.05,18.744 46.684,18.11 47.955,18.11 48.489,18.644 48.489,25.171 47.752,25.908 46.228,25.908 45.339,26.797 44.679,26.797 44.233,26.351 43.888,26.351 43.764,26.228 U14.4@43.764,25.883
US0_RX: H1.4 LED2.C U3.4 | length 17
  Top Layer w0.152: H1.4@13.888,18.898 13.901,18.91 15.227,18.91 15.5,19.183 15.5,20.644 16.282,21.425 16.148,21.425 15.9,21.672 15.9,22.657 16.535,23.292 18.416,23.292 20.017,24.892 24.775,24.892 25.503,24.164 25.848,24.164 U3.4@25.902,24.11
US0_TX: H1.5 LED3.C U3.5 | length 34.5
  Top Layer w0.152: H1.5@9.988,17.628 8.611,17.628 8.052,17.069 8.052,14.503 8.966,13.589 15.536,13.589 15.816,13.868 v1(15.926,13.868) ; v1(15.926,15.316) 15.926,17.45 16.294,17.818 LED3.C@16.84,17.818 17.285,17.818 18.111,16.992 19.024,16.992 19.507,17.475 19.507,23.951 20.143,24.587 24.58,24.587 25.503,23.664 25.848,23.664 U3.5@25.902,23.61
  Bottom Layer w0.152: v1(15.926,13.868) v1(15.926,15.316)
US2_RX: U3.30 U9.2 | length 30.1
  Top Layer w0.152: U3.30@32.772,22.61 33.885,22.61 36.048,20.447 39.549,20.447 40.387,19.609 44.691,19.609 46.495,17.805 48.081,17.805 48.793,18.517 48.793,28.118 U9.2@47.219,29.693
US2_TX: U3.8 U9.1 | length 40.3
  Top Layer w0.152: v1(23.698,33.757) 24.155,33.299 24.155,31.602 24.892,30.866 24.892,28.576 25.73,27.738 25.73,27.173 25.379,26.822 24.705,26.822 24.514,27.014 23.872,27.014 v1(23.839,27.046) ; v1(24.613,22.479) 24.982,22.11 U3.8@25.902,22.11 ; v1(28.153,33.759) 28.164,33.759 28.518,34.112 40.564,34.112 40.792,33.884 45.568,33.884 U9.1@47.219,32.233
  Bottom Layer w0.152: v1(23.698,33.757) 23.7,33.759 v1(28.153,33.759) ; v1(23.839,27.046) 23.825,27.032 23.825,23.441 24.535,22.731 24.535,22.557 v1(24.613,22.479)
VBAT_OK: LED7.A U7.13 | length 12.6
  Top Layer w0.152: U7.13@12.993,40.005 13.026,39.972 13.535,39.972 14.444,39.063 14.444,37.327 14.948,36.823 20.033,36.823 20.399,37.189 20.399,39.145 20.568,39.313 21.063,39.313 LED7.A@21.107,39.357
VBAT_OV: R27.1 R34.2 U7.7 | length 6
  Top Layer w0.152: R27.1@9.804,34.252 9.804,34.309 8.306,35.808 R34.2@8.306,35.865 9.412,36.97 9.838,36.97 10.749,37.882 10.749,38.261 U7.7@10.803,38.315
VIN_DC: C26.1 D1.C D2.C L7.1 R25.1 R49.2 U7.2 | length 33.6
  Top Layer w0.254: 8.712,40.335 8.882,40.505 U7.2@9.613,40.505
  Top Layer w0.635: R25.1@1.829,35.852 1.829,37.813 4.465,40.45 4.763,40.45 L7.1@5.08,40.767 ; R49.2@4.572,45.779 4.572,45.784 4.58,45.792 4.616,45.792 7.874,49.05 D2.C@7.874,49.2 8.306,49.2 8.306,48.618 8.632,48.292 9.178,48.292 9.55,47.921 9.55,44.387 9.178,44.015 6.296,44.015 5.08,42.799 L7.1@5.08,41.783 L7.1@5.08,40.767 ; C26.1@7.096,38.989 C26.1@7.096,39.089 ; D2.C@8.128,49.454 D1.C@8.128,52.629 ; 8.712,40.335 7.649,39.272 7.279,39.272 C26.1@7.096,39.089 ; L7.1@5.08,40.767 6.575,39.272 6.913,39.272 C26.1@7.096,39.089
VOC_SAMP: R22.1 R24.1 R25.2 U7.3 | length 11.4
  Top Layer w0.152: R25.2@1.829,34.176 1.829,34.239 3.302,35.712 R22.1@3.302,35.776 3.298,35.78 3.298,37.182 R24.1@3.294,37.186 3.301,37.186 4.035,37.92 7.643,37.92 8.635,38.911 8.635,39.406 9.18,39.951 9.559,39.951 U7.3@9.613,40.005
VOUT: C28.1 H6.1 L8.2 R16.2 U7.14 | length 7.2
  Top Layer w0.254: U7.14@12.993,40.505 13.8,40.505 13.891,40.414
  Top Layer w0.508: 13.891,40.414 17.292,40.414 18.142,39.565 18.567,39.565 19.174,38.957 C28.1@19.174,38.532
VOUT_SET: R29.1 R37.2 U7.12 | length 6.9
  Top Layer w0.152: U7.12@12.993,39.505 13.047,39.451 13.426,39.451 14.139,38.738 14.139,37.201 14.822,36.518 15.26,36.518 R29.1@15.926,35.852 15.938,35.839 17.412,35.839 R37.2@17.424,35.827
VRDIV: R27.2 R28.2 R29.2 U7.8 | length 10.9
  Top Layer w0.152: U7.8@11.303,38.315 11.303,37.351 R27.2@9.804,35.852 9.804,35.801 11.328,34.277 R28.2@11.328,34.227 12.443,33.112 14.786,33.112 R29.2@15.926,34.252
VREF_SAMP: C27.1 U7.4 | length 4.9
  Top Layer w0.152: C27.1@6.604,36.119 6.668,36.119 7.11,36.561 7.11,36.625 8.939,38.454 8.939,39.211 9.18,39.451 9.559,39.451 U7.4@9.613,39.505
VREGSW: L5.1 U3.38 | length 2.9
  Top Layer w0.254: U3.38@31.587,26.295 31.59,26.298 31.59,26.715 31.678,26.803 32.006,27.131 32.149,27.131
  Top Layer w0.508: 32.149,27.131 33.858,27.131
VSTOR: C21.1 C22.1 C23.1 R24.2 U7.6 U7.19 | length 64.5
  Top Layer w0.152: R24.2@4.174,37.186 4.732,37.186 5.505,36.413 5.505,32.9 5.537,32.868 ; U7.6@10.303,38.315 9.665,38.315 7.568,36.218 7.568,33.548 6.887,32.868 5.537,32.868 ; C21.1@11.557,47.475 11.442,47.475 10.671,48.246 10.671,49.248 9.852,50.066 9.852,51.473 cw(c10.518,51.473) 9.855,51.537 9.855,53.924 9.576,54.204 7.264,54.204 6.934,53.873 6.934,51.74 6.35,51.156 6.35,48.819 3.658,46.126 1.219,46.126 0.655,45.562 0.655,33.33 1.346,32.639 5.309,32.639 5.537,32.868 ; C22.1@12.23,43.717 C22.1@12.243,43.704 ; C21.1@12.382,47.968 C21.1@12.471,47.879
  Top Layer w0.254: U7.19@10.803,41.695 10.803,42.445
  Top Layer w0.508: 10.803,42.445 10.803,43.62 10.706,43.717 C22.1@12.23,43.717 ; C22.1@12.243,43.704 12.343,43.704 12.589,43.95 12.589,44.05 13.249,44.71 13.249,46.407 12.219,47.438 12.219,47.475 C21.1@11.557,47.475 12.05,47.968 C21.1@12.382,47.968 ; C21.1@12.471,47.475 C21.1@12.471,47.879
pads on no net: H3.2 H3.3 H3.4 MH5.1 MH6.1 MH12.1 MH13.1 MH14.1 MH15.1 U1.3 U3.13 U3.24 U5.3 U5.4 U5.5 U5.11 U5.12 U5.13 U8.8 U8.9 U8.10 U8.14 U10.3 U14.3 U15.1 U15.7 U15.8 U15.10 U15.12 U15.13 U15.14 U15.15 U15.16 U15.21 U15.22 U15.23 U15.24 U15.26 U15.27

## Polygon pours and split planes (outlines as drawn)
GND on Bottom Layer "GND_L02_P024" (solid, pour order 24): 92.701,89.04 92.701,62.243 59.681,62.243 59.681,89.04
GND on Bottom Layer "GND_L02_P001" (solid, remove dead copper, pour order 1): 0.508,59.436 0.508,9.779 34.9,9.779 34.9,59.436
GND on Bottom Layer "GND_L02_P004" (solid, remove dead copper, pour order 4): 25.908,59.436 52.4,59.436 52.4,18.72 25.908,18.72
GND on Bottom Layer "GND_L02_P005" (solid, remove dead copper, pour order 5): 33.274,0.508 52.4,0.508 52.4,19.05 33.274,19.05
+3V2_VMCU on Top Layer "+3V2_VMCU_L01_P029" (solid, pour order 29): 42.062,18.518 42.062,17.882 42.559,17.385 42.862,17.385 43.358,16.889 43.358,15.403 43.141,15.186 42.03,15.186 42.001,15.157 42.001,14.819 42.071,14.748 42.109,14.786 43.141,14.786 43.336,14.786 43.866,15.316 43.866,17.892 42.973,18.785 42.596,18.785 42.518,18.862 42.172,18.862
ULTSEN_PWR on Top Layer "ULTSEN_PWR_L01_P025" (solid, pour order 25): 44.871,29.991 44.798,29.918 44.798,29.01 44.798,29.114 44.86,28.926 44.86,27.345 45.26,27.345 45.26,28.535 45.548,28.823 45.713,28.926 45.798,29.01 45.798,29.918 45.651,30.064 45.048,30.064 44.974,29.991
LCD_PWR on Top Layer "LCD_PWR_L01_P027" (solid, pour order 27): 44.058,15.186 44.058,14.653 44.645,14.066 44.645,13.494 44.973,13.167 45.294,13.167 45.392,13.265 45.496,13.265 45.496,13.369 45.569,13.442 45.569,14.246 45.498,14.316 45.248,14.316 45.248,14.786 45.248,15.186
+3V2_VMCU on Top Layer "+3V2_VMCU_L01_P026" (solid, pour order 26): 44.874,26.478 44.874,25.302 44.452,25.302 43.785,24.746 43.674,23.88 43.83,23.724 44.807,23.724 44.885,23.802 44.996,23.802 44.996,23.912 45.074,23.99 45.26,25.302 45.26,26.478
LBOOST on Top Layer "LBOOST_L01_P014" (solid, remove dead copper, pour order 14): 10.4,42.14 10.205,42.14 10.173,42.108 8.848,43.432 7.061,43.432 7.061,40.199 7.908,40.225 7.776,40.225 7.908,40.225 8.985,41.249 10.424,41.237
+3V2_VMCU on Top Layer "+3V2_VMCU_L01_P021" (solid, remove dead copper, pour order 21): 27.75,29.843 27.672,29.121 27.672,28.965 27.75,28.933 27.672,29.025 29.457,27.24 29.457,25.93 29.522,25.865 29.652,25.865 29.717,25.93 29.717,30.209 28.805,29.921
VREGSW on Top Layer "VREGSW_L01_P022" (solid, remove dead copper, pour order 22): 39.049,28.889 36.382,28.889 36.055,28.667 34.128,28.667 32.791,27.33 32.791,26.878 34.067,26.878 34.827,27.639 39.049,27.639
+1V8_DCDC on Top Layer "+1V8_DCDC_L01_P019" (solid, remove dead copper, pour order 19): 37.871,32.995 37.871,32.719 37.049,31.998 37.049,31.239 37.049,29.972 40.818,29.972 41.236,30.389 41.236,30.951 40.867,31.32 40.349,31.32 40.193,31.32 39.8,31.32 38.379,32.741 38.379,32.995
+3V2_VMCU on Top Layer "+3V2_VMCU_L01_P020" (solid, remove dead copper, pour order 20): 36.062,29.827 36.08,29.816 36.08,29.043 36.034,28.997 35.97,28.933 35.892,28.854 33.985,28.854 32.715,27.584 31.979,27.584 31.286,26.892 31.09,27.088 31.058,27.12 31.058,27.268 31.058,27.329 31.09,27.356 32.588,28.854 32.345,29.097 32.345,29.45 32.817,29.921 35.892,29.921
VOUT on Top Layer "VOUT_L01_P023" (solid, pour order 23): 25.273,46.533 22.382,46.533 21.837,47.077 20.713,46.914 20.713,44.864 18.985,43.136 17.135,43.136 17.135,40.204 17.615,39.714 18.299,39.044 18.299,37.527 18.571,37.194 19.612,37.132 19.74,37.26 19.921,37.26 19.921,37.441 20.049,37.569 20.049,41.474 22.314,43.739 25.273,43.739
GND on Top Layer "GND_L01_P007" (solid, remove dead copper, pour order 7): 34.952,0.483 34.849,16.154 31.195,16.789 28.706,20.291 25.908,20.232 25.908,14.732 25.146,14.732 24.384,13.97 22.403,11.989 0.508,11.989 0.508,9.779 33.274,9.779 33.274,0.483
LBUCK on Top Layer "LBUCK_L01_P012" (solid, remove dead copper, pour order 12): 15.935,43.136 14.129,43.136 13.124,42.13 12.183,42.13 12.173,42.121 12.173,41.282 12.433,41.282 13.614,41.282 13.614,40.894 13.672,40.836 15.935,40.836

## Other copper
Top Layer:
  pour cut-out: 26.457,19.79 26.457,18.875 26.429,18.847 25.908,18.847 25.908,19.823
  pour cut-out: 31.353,12.309 31.394,12.268 34.874,12.268 34.874,11.633 34.823,11.684 31.369,11.684
  pour cut-out: 28.081,16.953 28.081,16.423 28.24,16.423 28.24,16.953
  pour cut-out: 29.018,16.953 29.018,16.423 28.86,16.423 28.86,16.953
  pour cut-out: 28.081,13.143 28.081,12.613 28.24,12.613 28.24,13.143
  pour cut-out: 29.018,13.143 29.018,12.613 28.86,12.613 28.86,13.143
  pour cut-out: 31.353,16.407 31.353,12.309 31.394,12.268 34.874,12.268 34.874,16.308 34.845,16.337

## Silkscreen, mask and mechanical layers (free items; w line width, h text height)
Top Overlay:
  lines w0.254: 0.381,13.158 20.066,13.158 20.066,22.796 7.364,22.796 ; 0.381,16.637 7.339,16.637 7.339,33.172 ; 0.381,33.325 26.48,33.325 ; 20.066,22.606 20.066,33.325 ; 26.48,59.69 26.48,58.737 26.48,33.325 ; 52.222,33.325 26.48,33.325
  text "GO" at 71.12,86.69 h0.76
  text "Menu  / Control" at 87.503,83.515 h0.76 r90
  text "GND" at 89.306,82.474 h0.64 r90
  text "3V2" at 89.332,79.477 h0.64 r90
  text "GO" at 89.306,76.124 h0.64 r90
  text "DOWN" at 87.833,75.514 h0.76 r90
  text "BACK" at 89.306,73.076 h0.64 r90
  text "UP" at 61.036,72.974 h0.76 r90
  text "DOWN" at 89.306,70.155 h0.64 r90
  text "UP" at 89.306,68.377 h0.64 r90
  text "BACK" at 76.784,64.414 h0.76 r180
  text "USB" at 3.073,58.572 h0.64
  text "BAT" at 10.77,56.921 h0.64 r90
  text "Solar Panel" at 63.297,55.855 h0.64
  text "POWER" at 25.933,55.423 h0.76 r90
  text "V+" at 73.05,55.347 h0.64
  text "V-" at 81.966,55.296 h0.64
  text "BAT_CONN" at 22.602,54 h0.64 r90
  text "USB" at 5.69,53.492 h0.64 r90
  text "R_SENSE" at 26.031,49.555 h0.64 r90
  text "MAG_ENC" at 33.016,48.92 h0.64 r90
  text "VMCU" at 26.137,46.507 h0.64 r90
  text "VOUT" at 26.137,43.332 h0.64 r90
  text "VBAT" at 20.345,40.03 h0.64
  text "VMCU" at 25.375,39.903 h0.64 r90
  text "SOLAR" at 1.499,37.236 h0.64 r90
  text "PMIC" at 9.208,36.827 h0.76
  text "MAGNETIC / ENCODER" at 51.664,34.722 h0.76 r90
  text "SCLK" at 27.33,33.655 h0.64
  text "MISO" at 30.133,33.664 h0.64
  text "MOSI" at 32.91,33.664 h0.64
  text "GND" at 35.911,33.635 h0.64
  text "B" at 39.669,33.621 h0.64
  text "A" at 42.193,33.621 h0.64
  text "CS" at 44.591,33.621 h0.64
  text "TX2" at 48.539,32.283 h0.64
  text "SDA" at 19.406,30.124 h0.64 r90
  text "RX2" at 48.539,28.981 h0.64
  text "ULT" at 42.491,28.363 h0.76 r90
  text "SCL" at 19.406,27.203 h0.64 r90
  text "ULTPWR" at 48.539,26.822 h0.64
  text "GND" at 19.406,24.536 h0.64 r90
  text "GND" at 48.666,24.282 h0.64
  text "IMU" at 8.636,23.622 h0.76
  text "EXTCOM" at 48.539,21.361 h0.64
  text "LCDCS" at 48.539,18.821 h0.64
  text "RX" at 15.646,18.567 h0.64
  text "EFR32" at 30.912,17.729 h0.76
  text "Reset" at 0.889,17.12 h0.76
  text "MOSI" at 48.539,16.916 h0.64
  text "TX" at 16.281,15.011 h0.64
  text "SCLK" at 48.539,13.868 h0.64
  text "Debug" at 5.715,13.691 h0.76
  text "GND" at 48.539,11.201 h0.64
  text "LED" at 36.601,11.074 h0.64
  text "LCD" at 45.972,10.856 h0.76 r90
  text "LCDPWR" at 48.539,8.661 h0.64
  text "GND" at 40.411,7.087 h0.64 r90
  text "CUBIT" at 0.787,4.724 h0.64
  text "Saloni Shah" at 0.787,3.454 h0.64
  text "3V2" at 37.236,2.819 h0.64
  text "GO" at 39.776,2.819 h0.64
  text "BACK" at 41.935,2.819 h0.64
  text "DOWN" at 45.11,2.819 h0.64
  text "UP" at 48.412,2.819 h0.64
  text "Rajat Chaple" at 0.787,2.142 h0.64
  text "LPEDT_S2022" at 0.787,0.766 h0.64
Bottom Overlay:
  drawing of 61 lines, arcs and shapes, not listed
  text "Solar Panel" at 69.723,55.855 h0.64
  text "V+" at 74.016,55.347 h0.64
  text "V-" at 83.033,55.296 h0.64
  text "TX2" at 45.568,32.537 h0.64
  text "RX2" at 45.568,29.489 h0.64
  text "ULTRASONIC" at 49.428,27.457 h0.64 r270
  text "ULTPWR" at 45.568,27.33 h0.64
  text "GND" at 45.568,24.282 h0.64
  text "EXTCOM" at 45.695,21.615 h0.64
  text "LCD" at 49.174,21.234 h0.64 r270
  text "LCDCS" at 45.568,19.456 h0.64
  text "MOSI" at 45.568,16.535 h0.64
  text "SCLK" at 45.568,13.741 h0.64
  text "GND" at 45.568,11.455 h0.64
  text "LCDPWR" at 49.047,7.772 h0.64 r270
  text "GND" at 39.776,7.137 h0.64 r270
  text "3V2" at 38.837,2.819 h0.64
  text "GO" at 40.742,2.819 h0.64
  text "BACK" at 44.171,2.819 h0.64
  text "DOWN" at 47.346,2.819 h0.64
  text "UP" at 49.378,2.819 h0.64
  text "Menu Control" at 50.089,1.295 h0.64
Mechanical 10:
  lines w1: 57.277,54.821 54.534,54.821 54.534,4.775 57.335,4.775 57.335,0.483 ; 57.302,2.507 98.704,2.507 ; 57.302,58.06 98.603,58.06 ; 57.335,54.821 57.335,59.512
Mechanical 12:
  lines w0.508: 0,0 0,59.944 58.496,59.944 58.496,89.789 93.777,89.789 93.777,59.944 99.06,59.944 99.06,0 50.038,0 0,0

## Text inside footprints (layer, text, board x,y; h text height)
H3: Mechanical 13 "PCB END" at -0.762,52.562 h0.5 r270
S1: Top Overlay "+" at 58.53,50.772 h3.81 r270; Top Overlay "-" at 58.403,36.167 h3.81 r270
S2: Top Overlay "-" at 58.395,12.13 h3.81 r270; Top Overlay "+" at 58.522,26.735 h3.81 r270
S3: Top Overlay "+" at 67.031,50.851 h3.81 r270; Top Overlay "-" at 66.904,36.246 h3.81 r270
S4: Top Overlay "-" at 66.904,12.116 h3.81 r270; Top Overlay "+" at 67.031,26.721 h3.81 r270
S5: Top Overlay "+" at 75.54,50.851 h3.81 r270; Top Overlay "-" at 75.413,36.246 h3.81 r270
S6: Top Overlay "-" at 75.413,12.13 h3.81 r270; Top Overlay "+" at 75.54,26.735 h3.81 r270
S7: Top Overlay "+" at 84.049,50.851 h3.81 r270; Top Overlay "-" at 83.922,36.246 h3.81 r270
S8: Top Overlay "-" at 83.922,12.13 h3.81 r270; Top Overlay "+" at 84.049,26.735 h3.81 r270
S9: Top Overlay "+" at 92.735,50.927 h3.81 r270; Top Overlay "-" at 92.608,36.322 h3.81 r270
S10: Top Overlay "-" at 92.431,12.13 h3.81 r270; Top Overlay "+" at 92.558,26.735 h3.81 r270